# EAGLE board AD5941_testboard (EAGLE 8.4.0)
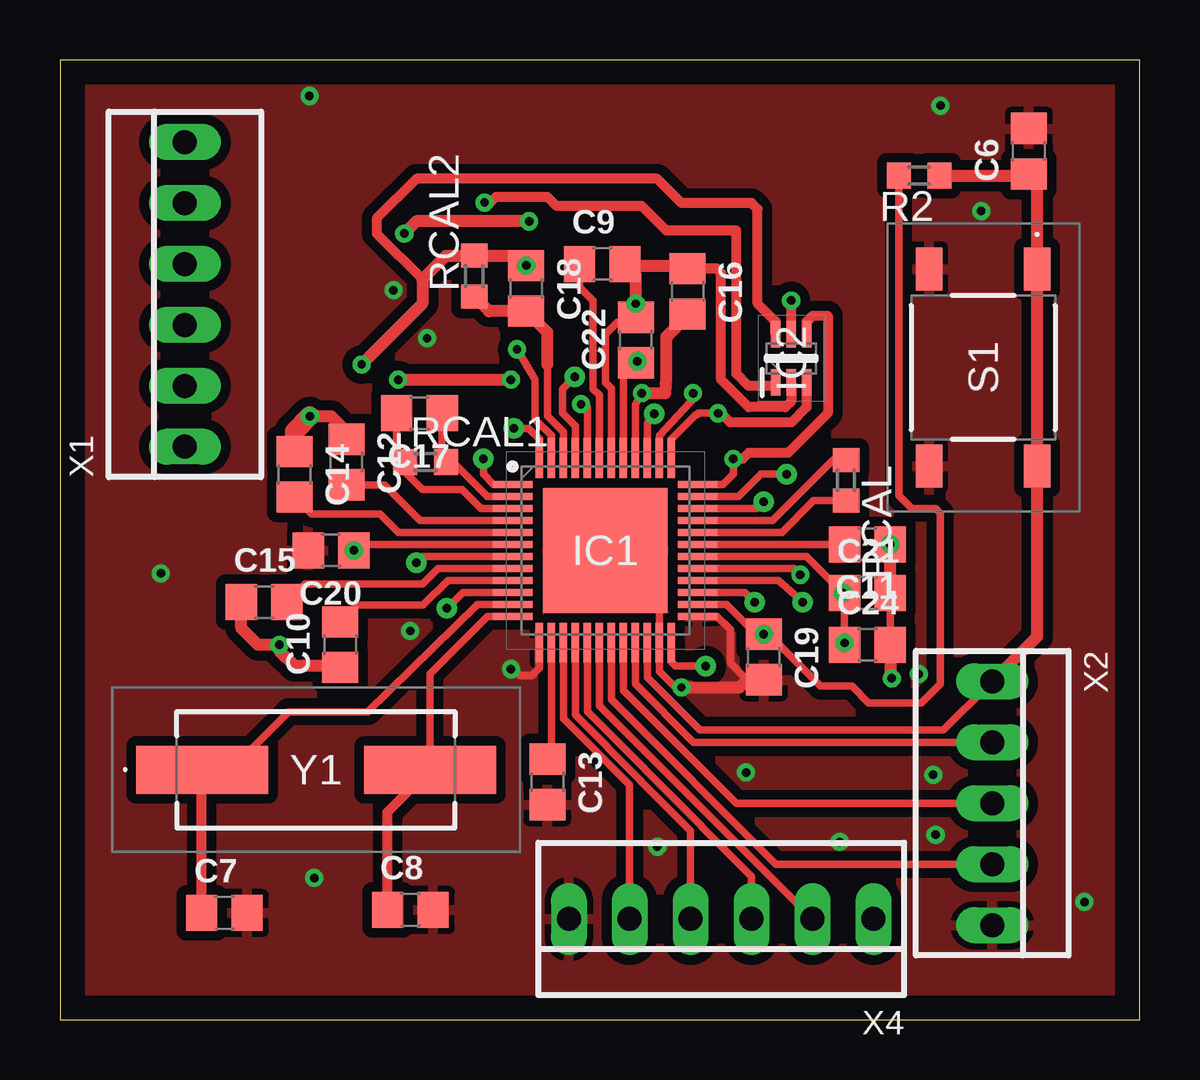
[diagram p0: board, top side]
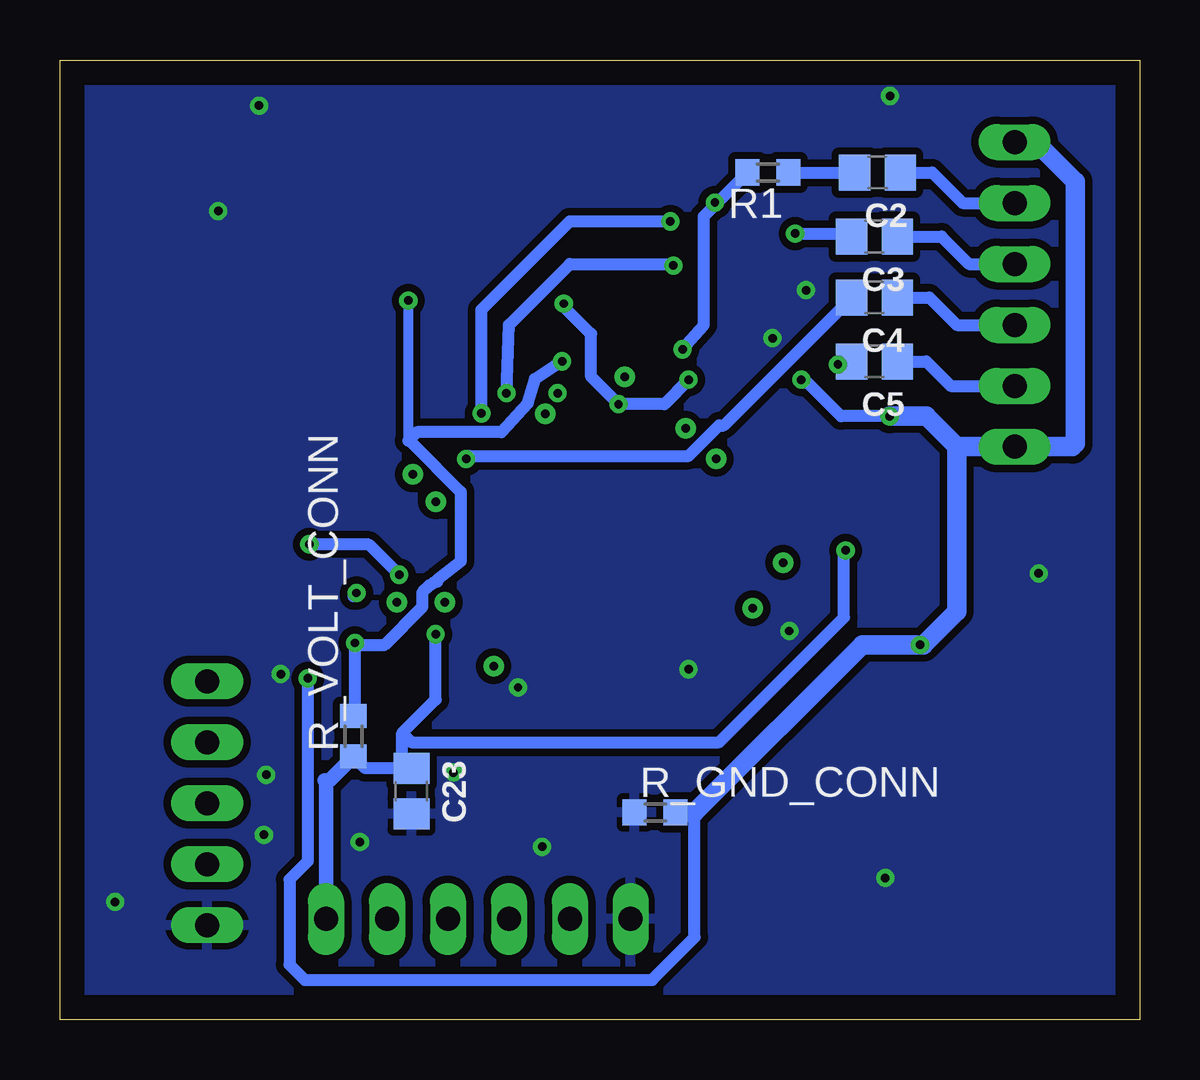
[diagram p1: board, bottom side, seen from below]

Size 45 x 40 mm. Coordinates in mm from the lower left corner, seen from the top.
Outline: 0,0 45,0 45,40 0,40 0,0
Copper layers (1*16): Top 0.035mm / dielectric 1.5mm / Bottom 0.035mm
Design rules "default": minimum track width 6mil, minimum drill 0.35mm, track to track 6mil, track to pad 6mil, pad to pad 6mil, via to via 6mil, smd to smd 6mil, copper to edge 40mil, drill to drill 6mil, minimum pad ring 10mil, minimum via ring 8mil, stop-mask expansion 4mil, vias tented up to drill 0mil, thermal gap 10mil

## Footprints (pad centres in the part's own frame; a part is rotated, then mirrored left to right if it is on the bottom)
C0805 = smd 1.3 x 1.5: 1 -0.95,0; 2 0.95,0
QFN50P700X700X80-49N = smd 1.65 x 0.3: 1 -3.85,2.75; 2 -3.85,2.25; 3 -3.85,1.75; 4 -3.85,1.25; 5 -3.85,0.75; 6 -3.85,0.25; 7 -3.85,-0.25; 8 -3.85,-0.75; 9 -3.85,-1.25; 10 -3.85,-1.75; 11 -3.85,-2.25; 12 -3.85,-2.75; 25 3.85,-2.75; 26 3.85,-2.25; 27 3.85,-1.75; 28 3.85,-1.25; 29 3.85,-0.75; 30 3.85,-0.25; 31 3.85,0.25; 32 3.85,0.75; 33 3.85,1.25; 34 3.85,1.75; 35 3.85,2.25; 36 3.85,2.75 | smd 0.3 x 1.65: 13 -2.75,-3.85; 14 -2.25,-3.85; 15 -1.75,-3.85; 16 -1.25,-3.85; 17 -0.75,-3.85; 18 -0.25,-3.85; 19 0.25,-3.85; 20 0.75,-3.85; 21 1.25,-3.85; 22 1.75,-3.85; 23 2.25,-3.85; 24 2.75,-3.85; 37 2.75,3.85; 38 2.25,3.85; 39 1.75,3.85; 40 1.25,3.85; 41 0.75,3.85; 42 0.25,3.85; 43 -0.25,3.85; 44 -0.75,3.85; 45 -1.25,3.85; 46 -1.75,3.85; 47 -2.25,3.85; 48 -2.75,3.85 | smd 5.2 x 5.2: 49 0,0
SOT65P220X110-6N = smd 1.1 x 0.4: 1 -1,0.65; 2 -1,0; 3 -1,-0.65; 4 1,-0.65; 5 1,0; 6 1,0.65
R0603 = smd 1 x 1.1: 1 -0.85,0; 2 0.85,0
TS406670R160SMTTR = smd 1.8 x 1.1: 1 -4.1,2.25; 2 4.1,2.25; 3 -4.1,-2.25; 4 4.1,-2.25
1XPIN+HOLE = drill 0.35: P$1 0,0
22-23-2061 = drill 1 long: 1 -6.35,0; 2 -3.81,0; 3 -1.27,0; 4 1.27,0; 5 3.81,0; 6 6.35,0
22-23-2051 = drill 1 long: 1 -5.08,0; 2 -2.54,0; 3 0,0; 4 2.54,0; 5 5.08,0
E1SJA1816000MTR = smd 5.5 x 2: 1 -4.75,0; 2 4.75,0

## Placement (x,y rotation side)
C2  [C0805]  10.92,35.31 180 bottom
C3  [C0805]  11.05,32.64 180 bottom
C4  [C0805]  11.05,30.1 180 bottom
C5  [C0805]  11.05,27.43 180 bottom
C6  100n  [C0805]  40.39,36.2 90 top
C7  18n  [C0805]  6.86,4.45 0 top
C8  18n  [C0805]  14.61,4.57 0 top
C9  4.7u  [C0805]  22.61,31.5 0 top
C10  100n  [C0805]  11.68,15.62 90 top
C11  470n  [C0805]  33.66,19.81 180 top
C12  470n  [C0805]  11.94,23.24 270 top
C13  470n  [C0805]  20.32,9.91 270 top
C14  470n?  [C0805]  9.78,22.73 270 top
C15  100n  [C0805]  8.51,17.4 0 top
C16  4.7n?  [C0805]  26.16,30.35 270 top
C17  220n?  [C0805]  14.99,25.27 180 top
C18  47n?  [C0805]  19.43,30.48 270 top
C19  100n  [C0805]  29.34,15.11 270 top
C20  100n  [C0805]  11.3,19.56 180 top
C21  10u  [C0805]  33.66,17.78 0 top
C22  100n  [C0805]  24,28.32 90 top
C23  10u  [C0805]  30.35,9.53 270 bottom
C24  100n  [C0805]  33.66,15.62 0 top
IC1  AD5941BCPZ  [QFN50P700X700X80-49N]  22.73,19.56 0 top
IC2  SP3002-04JTG  [SOT65P220X110-6N]  30.48,27.56 90 top
R1  [R0603]  15.49,35.31 180 bottom
R2  10k  [R0603]  35.81,35.18 180 top
R_GND_CONN  0R  [R0603]  20.19,8.64 0 bottom
R_VOLT_CONN  0R  [R0603]  32.77,11.81 90 bottom
RCAL  10k  [R0603]  32.77,22.48 270 top
RCAL1  1.8k?  [R0603]  15.24,23.24 0 top
RCAL2  10R?  [R0603]  17.27,30.99 90 top
S1  TS40-66-70-R-160-SMT-TR  [TS406670R160SMTTR]  38.48,27.18 270 top
U$1  1XPIN+HOLE  [1XPIN+HOLE]  26.92,14.73 0 top
U$2  1XPIN+HOLE  [1XPIN+HOLE]  17.65,23.37 0 top
U$3  1XPIN+HOLE  [1XPIN+HOLE]  16.13,17.14 0 top
U$4  1XPIN+HOLE  [1XPIN+HOLE]  18.92,24.64 0 top
U$5  1XPIN+HOLE  [1XPIN+HOLE]  21.46,26.8 0 top
U$6  1XPIN+HOLE  [1XPIN+HOLE]  24.77,25.25 0 top
U$7  1XPIN+HOLE  [1XPIN+HOLE]  30.3,22.73 0 top
U$8  1XPIN+HOLE  [1XPIN+HOLE]  29.34,21.59 0 top
U$9  1XPIN+HOLE  [1XPIN+HOLE]  28.96,17.4 0 top
U$10  1XPIN+HOLE  [1XPIN+HOLE]  30.96,17.4 0 top
U$11  1XPIN+HOLE  [1XPIN+HOLE]  14.86,19.05 0 top
X1  [22-23-2061]  5.21,30.23 90 top
X2  22-23-2051  [22-23-2051]  38.86,9.02 270 top
X4  [22-23-2061]  27.56,4.19 180 top
Y1  E1SJA18-16.000MTR  [E1SJA1816000MTR]  10.67,10.41 0 top

## Library data of the parts
C2-C24 R1 R2 R_GND_CONN R_VOLT_CONN RCAL RCAL1 RCAL2 = rcl
IC1 = AD5941BCPZ; ARROW_PART_NUMBER: AD5941BCPZ; ARROW_PRICE-STOCK: https://www.arrow.com/en/products/ad5941bcpz/analog-devices.html?utm_currency=USD&region=europe; DESCRIPTION: High Precision, Impedance & Electrochemical Front End; HEIGHT: 0.8mm; MANUFACTURER_NAME: Analog Devices; MANUFACTURER_PART_NUMBER: AD5941BCPZ; MOUSER_PART_NUMBER: 584-AD5941BCPZ; MOUSER_PRICE-STOCK: https://www.mouser.co.uk/ProductDetail/Analog-Devices/AD5941BCPZ?qs=B6kkDfuK7%2FDIxZEWBBp0eA%3D%3D
IC2 = SP3002-04JTG; ARROW_PART_NUMBER: SP3002-04JTG; ARROW_PRICE-STOCK: https://www.arrow.com/en/products/sp3002-04jtg/littelfuse?region=nac; DESCRIPTION: TVS Diode Array 4 Ch 15kV 1.1pF SC70-6; HEIGHT: 1.1mm; MANUFACTURER_NAME: LITTELFUSE; MANUFACTURER_PART_NUMBER: SP3002-04JTG; MOUSER_PART_NUMBER: 576-SP3002-04JTG; MOUSER_PRICE-STOCK: https://www.mouser.co.uk/ProductDetail/Littelfuse/SP3002-04JTG?qs=Xb8IjHhkxj40Q3K%2Fx81Vbw%3D%3D
S1 = TS40-66-70-R-160-SMT-TR; DESCRIPTION: 6 x 6 mm, 7 mm Actuator Height Off PCB, 160 gf, Red, Surface Mount, SPST, Tactile Switch -20 +70 C,50mA,12Vdc; HEIGHT: 7.1mm; MANUFACTURER_NAME: Same Sky; MANUFACTURER_PART_NUMBER: TS40-66-70-R-160-SMT-TR
U$1-U$11 = Pins_cost
X1 X4 = con-molex; MF: MOLEX; MPN: 22-23-2061; OC_FARNELL: 1462922; OC_NEWARK: 27C1933
X2 = con-molex; MF: MOLEX; MPN: 22-23-2051; OC_FARNELL: 1462952; OC_NEWARK: 38C9178
Y1 = E1SJA18-16.000MTR; DESCRIPTION: Crystals Crystals 16.000MHz 15ppm 18pF Parallel Resonant -40 C to +85 C; HEIGHT: 3.2mm; MANUFACTURER_NAME: ABRACON; MANUFACTURER_PART_NUMBER: E1SJA18-16.000MTR; MOUSER_PART_NUMBER: 815-E1SJA1816000MTR; MOUSER_PRICE-STOCK: https://www.mouser.co.uk/ProductDetail/ABRACON/E1SJA18-16.000MTR?qs=vmHwEFxEFR9FH5YYebvkCg%3D%3D

## Nets
AGND: C9.2 C10.1 C11.1 C12.1 C14.1 C15.1 C16.1 C21.2 C22.2 C24.2 IC1.29 IC1.42 IC1.44 IC2.2 R_GND_CONN.2 X1.1 X1.6
AIN1: C5.2 C18.1 IC1.38 IC2.6 RCAL2.2
AIN2: C3.2 IC1.37 IC2.3
AIN3: C4.2 IC1.36 IC2.4
AV3.3V: C21.1 C22.1 C24.1 IC1.30 IC1.41 IC2.5 R_VOLT_CONN.2
CE: IC1.47 IC2.1 R1.2
CS: IC1.15 X4.5
CSLK: IC1.16 X4.4
DE0: C18.2 IC1.46 RCAL2.1
DGND: C6.2 C7.2 C8.2 C13.2 C19.2 C20.2 C23.2 IC1.13 IC1.23 IC1.25 IC1.49 R_GND_CONN.1 S1.3 S1.4 X2.5 X4.6
DV3.3V: C19.1 C20.1 C23.1 IC1.6 IC1.26 R2.2 R_VOLT_CONN.1 X4.1
GPIO0: IC1.19 X2.4
GPIO1: IC1.20 X2.3
GPIO2: IC1.21 X2.2
MISO: IC1.18 X4.2
MOSI: IC1.17 X4.3
N$1: C2.2 R1.1
N$2: C2.1 X1.5
N$3: C3.1 X1.4
N$4: C4.1 X1.3
N$5: C5.1 X1.2
N$6: C13.1 IC1.14
N$7: C12.2 IC1.4
N$8: C11.2 IC1.31
N$9: C14.2 IC1.5
N$10: C9.1 IC1.43
N$11: C10.2 IC1.9
N$12: C15.2 IC1.8
N$13: C16.2 IC1.40
N$14: IC1.24 U$1.P$1
N$15: IC1.27 U$9.P$1
N$16: IC1.28 U$10.P$1
N$17: IC1.34 U$8.P$1
N$18: IC1.35 U$7.P$1
N$19: IC1.10 U$3.P$1
N$20: IC1.1 U$2.P$1
N$21: IC1.7 U$11.P$1
N$22: IC1.48 U$4.P$1
N$23: IC1.45 U$5.P$1
N$24: IC1.39 U$6.P$1
RC00: C17.2 IC1.3 RCAL1.1
RC01: C17.1 IC1.2 RCAL1.2
RCAL0: IC1.32 RCAL.2
RCAL1: IC1.33 RCAL.1
RESET: C6.1 IC1.22 R2.1 S1.1 S1.2 X2.1
XTAL0: C8.1 IC1.12 Y1.2
XTAL1: C7.1 IC1.11 Y1.1

## Tracks (layer width: path | path; a pad name or v marks a point on that pad's centre or on a via)
AGND  (via drill 0.35)
  Top 0.305: IC1.42 22.98,26.29 22.73,26.54 22.73,28.57 23.24,29.08 23.61,29.08 23.8,29.27 C22.2 | IC1.44 21.98,25.52 21.72,25.78 v21.72,25.65 | IC1.29 30.59,18.81 v30.86,18.54 | C24.2 C21.2
  Top 0.406: IC2.2 30.48,25.78 30.23,25.53 28.7,25.53 27.56,26.67 27.56,31.11 27.37,31.3 C16.1
  Top 0.508: v24,29.84 C22.2 24,31.05 23.65,31.4 | 23.65,31.4 C9.2 | C16.1 26.07,31.4 23.65,31.4 | C15.1 7.56,16.32 8.26,15.62 v9.14,15.62 9.14,15.37 9.78,14.73 11.62,14.73 C10.1 | v10.41,25.15 11.3,25.15 11.94,24.51 C12.1 | C24.2 34.6,14.16 34.67,14.1 v34.67,14.22 | C21.2 v34.6,19.81 | v14.1,26.67 v18.8,26.67
  Top 0.813: C14.1 9.78,24.51 v10.41,25.15
  Bottom 0.508: v24,29.84 24,29.72 22.86,28.57 22.86,26.8 v21.72,25.65 19.81,25.65 v18.8,26.67 | v34.67,14.22 34.67,6.6 35.43,5.84 35.43,2.29 34.8,1.65 20.32,1.65 18.54,3.43 18.54,8.64 | v10.41,25.15 12.45,25.15 13.84,26.54 13.97,26.54 v14.1,26.67 | v30.86,18.54 32.12,19.8 34.7,19.8 34.69,19.81 v34.6,19.81
  Bottom 0.813: X1.6 4.32,36.58 2.67,34.92 2.67,24 2.79,23.88 X1.1 7.62,23.88 | 7.62,23.88 7.62,17.02 9.02,15.62 v9.14,15.62 11.56,15.62 18.54,8.64 R_GND_CONN.2 | 7.62,23.88 8.89,25.15 v10.41,25.15
AIN1  (via drill 0.35)
  Top 0.305: IC1.38 24.98,24.35 26.52,25.98 v26.39,26.11
  Top 0.406: IC2.6 29.83,29.1 29.08,29.84 29.08,33.78 28.83,34.04 25.91,34.04 24.89,35.05 14.86,35.05 13.21,33.4 13.21,32.77 15.11,30.86
  Top 0.508: v12.57,27.3 15.11,29.84 15.11,30.86 16.09,31.84 RCAL2.2 19.02,31.84 C18.1
  Bottom 0.508: v26.39,26.11 26.29,28.96 23.75,31.5 19.43,31.5 C18.1 | C5.2 12.45,27.43 v12.57,27.3
  other vias: 19.43,31.43
AIN2  (via drill 0.35)
  Top 0.305: IC1.37 25.48,24.2 26.51,25.23 26.57,25.23 26.62,25.27 v27.43,25.27 27.56,25.27
  Top 0.406: IC2.3 31.11,26.54 31.11,25.53 30.48,24.89 27.94,24.89 27.56,25.27
  Top 0.508: v14.35,32.77 14.86,33.27 v19.56,33.27
  Bottom 0.508: v27.43,25.27 27.43,29.59 23.75,33.27 19.68,33.27 19.56,33.15 v19.56,33.27 | v14.35,32.77 12.13,32.77 C3.2
AIN3  (via drill 0.35)
  Top 0.305: v28.07,23.37 28.07,22.73 27.64,22.31 IC1.36
  Top 0.406: IC2.4 31.13,29.1 31.37,29.34 32,29.34 32,25.27 30.35,23.62 28.7,23.62 28.45,23.37 v28.07,23.37
  Bottom 0.508: v28.07,23.37 27.94,23.5 18.8,23.5 17.53,24.77 17.33,24.77 C4.2
AV3.3V  (via drill 0.35)
  Top 0.305: IC1.41 23.48,26.85 v24.07,27.44 | IC1.30 31.11,19.3 v32.64,17.78 C21.1 v32.7,15.7 C24.1
  Top 0.406: IC2.5 v30.48,29.97
  Top 0.813: C22.1 v24.07,27.44
  Bottom 0.406: v30.48,29.97 30.48,24.13
  Bottom 0.508: v24.07,27.44 25.2,26.7 25.5,25.68 26.6,24.49 30.12,24.49 30.48,24.13 30.42,24.13 29.34,23.05 29.34,23.04 28.3,22 28.3,19.1 29.24,18.36 29.27,18.26 29.43,18.2 29.6,18.1 29.9,17.8 29.9,17.2 31.5,15.6 32.7,15.6 32.7,15.61 | v32.64,17.78 32.77,17.65 | 32.7,15.61 v32.7,15.7 | R_VOLT_CONN.2 32.7,12.72 32.7,15.61
CE  (via drill 0.35)
  Top 0.305: IC1.47 20.48,24.34 19.86,24.96 19.86,24.97 19.81,25.02 19.81,26.67 v19.05,27.94
  Top 0.406: IC2.1 29.69,26.42 28.7,26.42 28.19,26.92 28.19,32.89 25.27,32.89 24.26,33.91 20.7,33.91 20.32,34.29 18.16,34.29 17.78,33.91 17.7,33.99 v17.7,34.06
  Bottom 0.406: v17.7,34.06 17.68,34.06 17.63,34.02
  Bottom 0.508: v19.05,27.94 18.16,28.96 18.16,33.49 17.63,34.02 R1.2
CS
  Top 0.305: IC1.15 20.98,12.54 23.75,9.78 X4.5
CSLK
  Top 0.305: IC1.16 21.48,12.69 24.21,9.97 24.21,9.96 26.29,7.87 X4.4
DE0
  Top 0.305: IC1.46 20.98,24.48 20.32,25.15 20.32,27.3 20.32,27.43
  Top 0.508: 20.32,27.3 20.32,28.64 C18.2 17.88,29.53 RCAL2.1
DGND  (via drill 0.35)
  Top 0.305: 26.04,13.84 v25.91,13.84 25.65,13.84 24.98,14.51 IC1.23 24.98,17.31 IC1.49 | IC1.13 19.98,14.65 19.68,14.35 19.18,14.35 18.92,14.61 v18.8,14.61 | IC1.25 27.39,16.81 27.94,16.26 27.94,14.86 28.64,14.16 C19.2
  Top 0.508: v25.91,13.84 28.32,13.84 28.64,14.16
  other vias: 24.9,7.2 32.5,7.4 28.6,10.3 36.5,7.7 36.4,10.2 35.8,14.4 14.6,16.2 15.3,28.4 10.6,5.9 42.7,4.9 36.7,38.1 10.4,38.5 4.2,18.6 38.4,33.7 13.9,30.4
  pour Bottom (isolate 0.305): 0,0 44.1,0 44.1,40 0,40
  pour Top (isolate 0.406): 0,0 44.2,0 44.2,40 0,40
DV3.3V  (via drill 0.35)
  Top 0.305: IC1.6 12.5,19.81 C20.1 | IC1.26 27.78,17.31 28.83,16.26 29.14,16.26 C19.1 29.54,16.06 31.7,13.9 33,13.9 33.7,13.2 35.9,13.2 36.7,14 36.7,21.1 36.5,21.3 35.5,21.3 34.96,21.84 R2.2
  Bottom 0.508: R_VOLT_CONN.1 32.28,10.47 C23.1 30.73,10.86 30.73,11.94 | 30.73,11.94 30.35,11.56 17.53,11.56 12.32,16.76 12.32,19.43 12.25,19.5 C20.1 | 30.73,11.94 29.34,13.34 C19.1
  Bottom 0.61: X4.1 33.91,9.91 33.96,9.96 33.77,9.96 R_VOLT_CONN.1
  other vias: 29.34,16.06 12.25,19.56
GPIO0
  Top 0.305: IC1.19 22.98,13.34 29.84,6.48 X2.4
GPIO1
  Top 0.305: IC1.20 23.5,15.7 23.5,13.72 28.19,9.02 X2.3
GPIO2
  Top 0.305: IC1.21 23.98,13.99 26.42,11.56 X2.2
MISO
  Top 0.305: IC1.18 22.48,13.08 X4.2
MOSI
  Top 0.305: IC1.17 21.98,12.84 26.75,8.07 26.75,8.05 28.83,5.97 X4.3
N$1
  Bottom 0.508: R1.1 C2.2
N$2
  Bottom 0.508: C2.1 8.64,35.31 7.37,34.04 X1.5
N$3
  Bottom 0.508: C3.1 8.26,32.64 7.11,31.5 X1.4
N$4
  Bottom 0.508: C4.1 8.76,30.1 7.62,28.96 X1.3
N$5
  Bottom 0.508: C5.1 8.89,27.43 7.87,26.42 X1.2
N$6
  Top 0.305: IC1.14 20.48,11.02 C13.1
N$7
  Top 0.305: IC1.4 15.01,20.81 13.52,22.29 C12.2
N$8
  Top 0.305: IC1.31 C11.2
N$9
  Top 0.305: IC1.5 14.11,20.31 13.34,21.08 10.48,21.08 C14.2
N$10
  Top 0.305: IC1.43 22.48,26.03 22.23,26.29 22.23,29.97 21.66,30.54 C9.1
N$11
  Top 0.305: IC1.9 16.18,18.31 15.14,17.27 12.38,17.27 C10.2
N$12
  Top 0.305: IC1.8 15.76,18.81 15.11,18.16 10.22,18.16 C15.2
N$13  (via drill 0.35)
  Top 0.305: v24.26,26.11 23.98,25.63 IC1.40
  Top 0.508: v24.26,26.11 25.24,26.11 25.27,26.74 25.27,28.45 26.16,29.34 C16.2
N$14
  Top 0.305: IC1.24 25.48,14.9 25.65,14.73 U$1.P$1
N$15
  Top 0.305: IC1.27 28.55,17.81 U$9.P$1
N$16
  Top 0.305: IC1.28 29.95,18.31 U$10.P$1
N$17
  Top 0.305: IC1.34 29.05,21.31 U$8.P$1
N$18
  Top 0.305: IC1.35 28.29,21.81 29.21,22.73 U$7.P$1
N$19
  Top 0.305: IC1.10 16.79,17.81 U$3.P$1
N$20
  Top 0.305: IC1.1 18.08,22.31 17.65,22.73 U$2.P$1
N$21
  Top 0.305: IC1.7 15.12,19.31 U$11.P$1
N$22
  Top 0.305: IC1.48 19.98,24.19 19.54,24.64 U$4.P$1
N$23
  Top 0.305: IC1.45 21.48,24.75 20.95,25.27 20.95,26.29 U$5.P$1
N$24
  Top 0.305: IC1.39 24.48,24.86 U$6.P$1
RC00
  Top 0.305: IC1.3 17.55,21.31 16.76,22.1 15.11,22.1 14.39,22.82 RCAL1.1 14.04,23.59 C17.2
RC01
  Top 0.305: IC1.2 17.82,21.81 16.38,23.24 RCAL1.2 15.94,23.39 C17.1
RCAL0
  Top 0.305: IC1.32 30.09,20.31 31.41,21.63 RCAL.2
RCAL1
  Top 0.305: IC1.33 29.7,20.81 32.22,23.33 RCAL.1
RESET
  Top 0.305: IC1.22 24.48,14.25 26.67,12.06 36.83,12.06 38.67,13.91 X2.1
  Top 0.508: 38.67,13.91 40.73,15.97 S1.2 S1.1 40.73,34.9 C6.1 40.32,35.18 R2.1
XTAL0
  Top 0.305: IC1.12 17.82,16.81 15.42,14.4 Y1.2
  Top 0.406: C8.1 13.65,8.65 Y1.2
XTAL1
  Top 0.305: IC1.11 17.41,17.31 12.83,12.83 9.53,12.83 6.6,9.91 5.08,9.91 5.59,10.41 5.71,10.41 Y1.1
  Top 0.406: C7.1 5.91,10.22 5.71,10.41